# Altium PCB pcb.pcbdoc
Units mm, origin at the board's own origin, x right, y up, seen from the top; angles counter-clockwise.
Board outline 67.62 x 50.17 mm, 2 copper layers (Top Layer, Bottom Layer); 41 components, 42 nets, 145 pads, 50 vias.
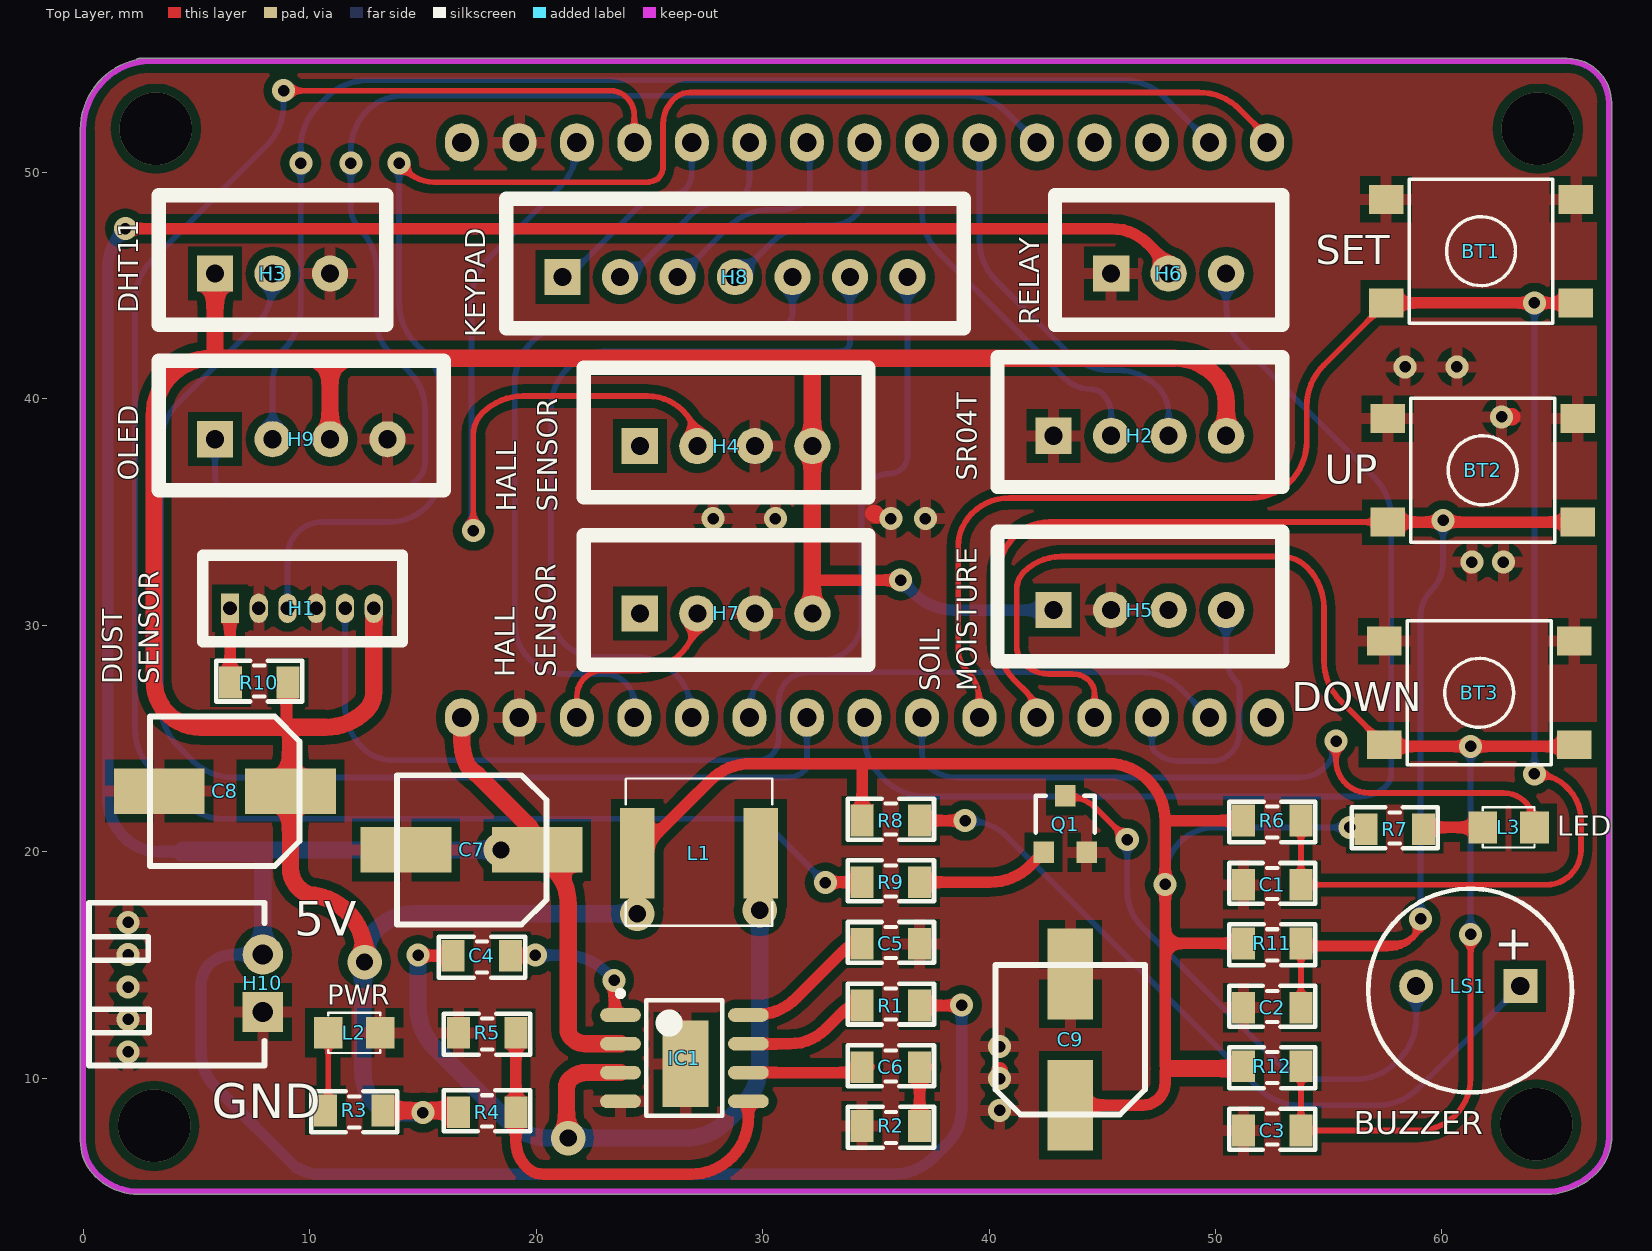
[diagram p0: Top Layer view]
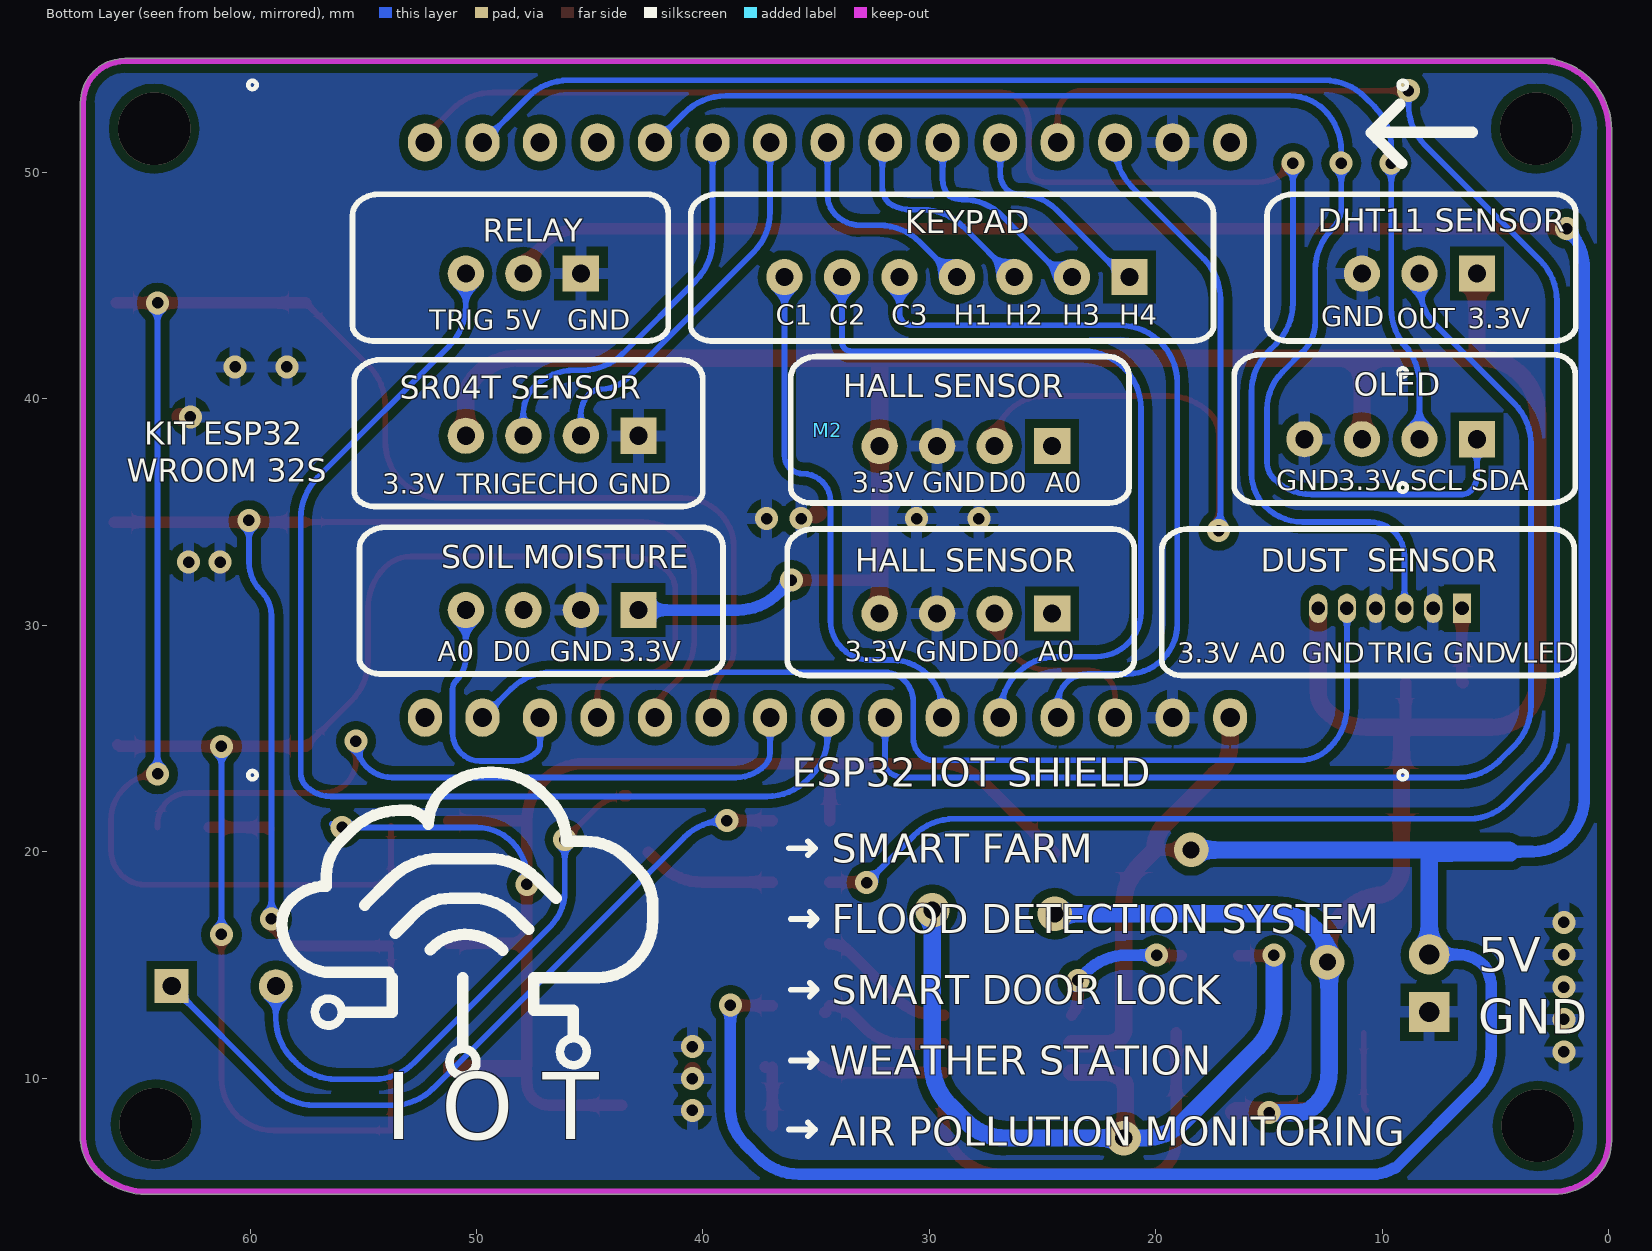
[diagram p1: Bottom Layer view, seen from below]
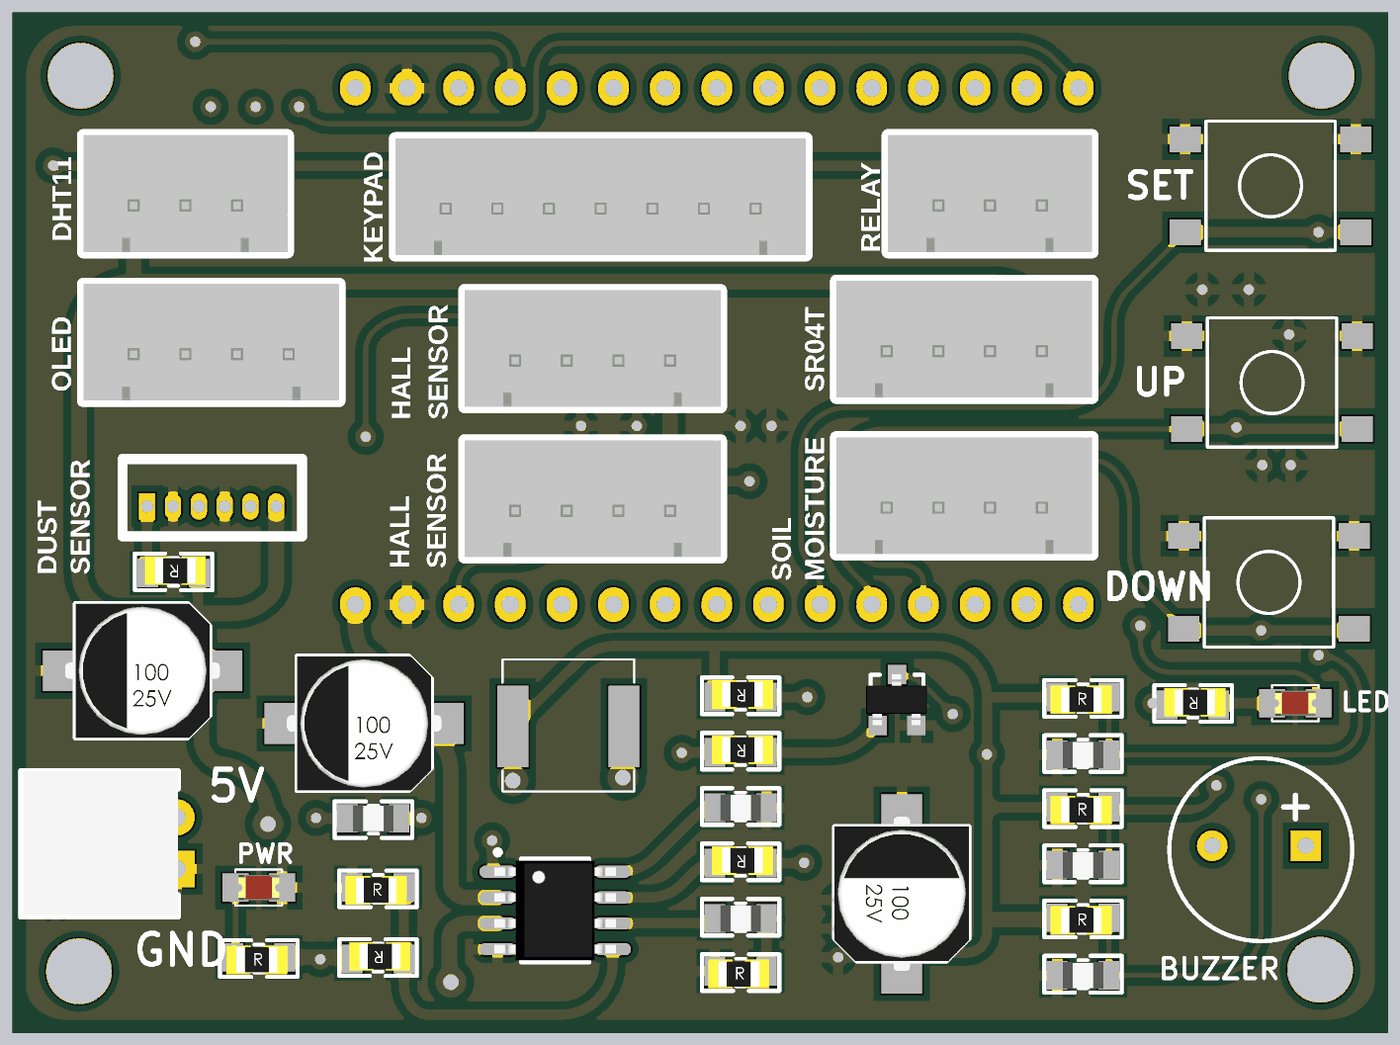
[diagram p2: 3D render of the assembled board from above, using the file's embedded part models]

## Layer stack, top to bottom
Top Solder: solder mask 0.0102, Solder Resist, Dk 3.5
Top Layer: signal copper 0.0356
Dielectric 1: dielectric 0.32, FR-4, Dk 4.8
Bottom Layer: signal copper 0.0356
Bottom Solder: solder mask 0.0102, Solder Resist, Dk 3.5

## Board outline
0.52,5.672 cw(c2.081,7.234) -0.127,7.234 -0.127,51.888 cw(c3.066,51.888) 0.808,54.146 cw(c0.898,54.056) 0.808,54.147 0.808,54.146 0.824,54.163 ccw(c0.914,54.073) 0.824,54.162 0.824,54.163 cw(c2.938,52.049) 2.341,54.978 cw(c2.449,54.911) 2.449,55.038 65.54,55.038 cw(c65.54,53.09) 66.917,54.468 cw(c65.54,53.09) 67.488,53.09 67.488,7.234 cw(c67.361,7.234) 67.479,7.187 cw(c65.279,7.386) 66.841,5.824 cw(c66.751,5.914) 66.841,5.824 66.825,5.808 ccw(c66.735,5.898) 66.825,5.808 cw(c64.567,8.066) 64.567,4.873 2.449,4.873 cw(c2.449,7.602)

## Design rules (kind name [scope] priority, off if disabled: settings)
Clearance [All] p1: gap=0.381 ignorepadtopadclearanceinfootprint=FALSE
PolygonConnect [All] p1: connectstyle=Relief reliefconductorwidth=0.508 reliefentries=4 polygonreliefangle="90 Angle" airgapwidth=0.381
RoutingVias [All] p1: holewidth=0.508 width=1.016 viastyle="Through Hole" minholewidth=0.508 minwidth=1.016 maxholewidth=0.508 maxwidth=1.016
SolderMaskExpansion [All] p1: expansion=0.102 istentingtop=FALSE
Width [All] p1: maxlimit=0.762 minlimit=0.254 preferedwidth=0.508
30 further rules are at their usual default settings.

## Classes and differential pairs
component class BLOCKDIAGRAM: *

## Components (designator, comment, footprint, x,y, rotation, side; value= is the part's Value field where it differs from the comment)
BT1 "Nut Nhan 4 Chan SMD 6x6" "Nut Nhan 4 Chan SMD 6x6" 61.722,46.529 r180 top
BT2 "Nut Nhan 4 Chan SMD 6x6" "Nut Nhan 4 Chan SMD 6x6" 61.798,36.852 r180 top
BT3 "Nut Nhan 4 Chan SMD 6x6" "Nut Nhan 4 Chan SMD 6x6" 61.646,27.022 r180 top
C1 "104" "tu 0805" 52.502,18.67 r180 top
C2 "104" "tu 0805" 52.502,13.245 r180 top
C3 "104" "tu 0805" 52.502,7.819 r180 top
C4 "103" "Tu 0805" 17.602,15.287 r0 top
C5 "104" "Tu 0805" 35.662,16.064 r180 top
C6 "4.7nf" "Tu 0805" 35.662,10.618 r180 top
C7 "100uF" "tu nhom 6.3 (d)" 17.149,20.088 r180 top
C8 "100uF" "tu nhom 6.3 (d)" 6.248,22.678 r180 top locked
C9 "100uF" "tu nhom 6.3 (d)" 43.586,11.706 r90 top
H1 "Header 6P 2.54" "Header 6P 1.27" 6.477,30.756 r0 top
H2 "Header 4P 2.54" XH2.54M-4 42.85,38.376 r0 top
H3 "Header 3P 2.54" XH2.54M-3 5.817,45.538 r0 top
H4 "Header 4P 2.54" XH2.54M-4 24.575,37.918 r0 top
H5 "Header 4P 2.54" XH2.54M-4 42.85,30.679 r0 top
H6 "Header 3P 2.54" XH2.54M-3 45.39,45.538 r0 top
H7 "Header 4P 2.54" XH2.54M-4 24.575,30.527 r0 top
H8 "Header 7P 2.54" XH2.54M-7 21.158,45.386 r0 top
H9 "Header 4P 2.54" XH2.54M-4 5.817,38.223 r0 top
H10 "Header 2P 2.54" "Header 2P DC 2.54" 6.731,12.925 r180 top
IC1 "MP2307 BUCK 3A" "SOP8 2" 23.744,8.989 r0 top
L1 "47uH SMD" "Cuon Cam 6.5x6.5 SMD" 30.683,23.491 r180 top
L2 "LED 0805" LED-0805-Red 10.82,12.01 r0 top
L3 "LED 0805" LED-0805-Red 61.798,21.078 r0 top
LS1 "Coi Chip Speaker" "COI CHIP 9MM" 66.759,14.068 r180 top
M2 "Module ESP32 WROOM" "Module esp32 wroom" 52.273,25.93 r180 bottom locked
Q1 "HF" SOT23 43.358,21.231 r0 top value=C9014
R1 "100K" "Tro SMD 0805" 35.662,13.214 r180 top
R2 "8.2k" "Tro SMD 0805" 35.662,7.896 r0 top
R3 "1k" "Tro SMD 0805" 11.963,8.581 r0 top
R4 "12k" "Tro SMD 0805" 17.831,8.505 r180 top
R5 "4.7k" "Tro SMD 0805" 17.831,12.01 r0 top
R6 "100R" "tro smd 0805" 52.502,21.383 r0 top
R7 "1k" "Tro SMD 0805" 57.912,21.002 r180 top
R8 "100R" "tro smd 0805" 35.662,21.383 r180 top
R9 "1k" "tro smd 0805" 35.662,18.66 r180 top
R10 "100R" "tro smd 0805" 7.772,27.479 r180 top
R11 "100R" "tro smd 0805" 52.502,15.958 r0 top
R12 "100R" "tro smd 0805" 52.502,10.532 r0 top

## Footprints (in the part's own frame and the unit in brackets; to place one, negate y for a bottom-side part, rotate by r counter-clockwise, add the part's x,y. Pads: shape width x height; smd on the part's side, far side on the other; paste and mask are expansions set on the pad)
"COI CHIP 9MM" [mm]
  rect 1.5x1.5 hole 0.8: 1(3.3,0)
  round 1.5 hole 0.8: 2(7.9,0)
  silkscreen extent 1.02,-4.31 10.02,4.69
"Cuon Cam 6.5x6.5 SMD" [mil]
  rect 60x157.48 smd: 1(30,140) 2(245,140)
  silkscreen extent 10,10 265,266
"Header 2P DC 2.54" [mil]
  rect 70x70 hole 35 unplated: 1(-47,0)
  round 70 hole 35 unplated: 2(-47,-100)
  silkscreen extent -50,-190 255,93, body extent -50,-190 250,90, height 237
"Header 6P 1.27" [mm]
  rect 0.8x1.3 hole 0.6: 1(0,0)
  oval 0.8x1.3 hole 0.6: 2(1.27,0) 3(2.54,0) 4(3.81,0) 5(5.08,0) 6(6.35,0)
  silkscreen extent -1.21,-1.47 7.62,2.34
LED-0805-Red [mil]
  rect 50x55 smd: 1(0,0) 2(90,0)
  silkscreen extent 0,-35 90,35, body extent 5,-25 85,25, height 43
"Module esp32 wroom" [mm]
  oval 1.5x1.7 hole 0.85: 1(0,0) 2(2.54,0) 3(5.08,0) 4(7.62,0) 5(10.16,0) 6(12.7,0) 7(15.24,0) 8(17.78,0) 9(20.32,0) 10(22.86,0) 11(25.4,0) 12(27.94,0) 13(30.48,0) 14(33.02,0) 15(35.56,0) 16(35.56,25.4) 17(33.02,25.4) 18(30.48,25.4) 19(27.94,25.4) 20(25.4,25.4) 21(22.86,25.4) 22(20.32,25.4) 23(17.78,25.4) 24(15.24,25.4) 25(12.7,25.4) 26(10.16,25.4) 27(7.62,25.4) 28(5.08,25.4) 29(2.54,25.4) 30(0,25.4)
  silkscreen extent -7.8,-2.72 43.36,28.12
"Nut Nhan 4 Chan SMD 6x6" [mil] "SW SMD button 4pin, 250 x250 mil"
  rect 60x50 smd: 1(-165,90) 2(165,-90) 3(165,90) 4(-165,-90)
  silkscreen extent -125,-125 125,125, body extent -180,-125 180,125, height 130
"SOP8 2" [mm]
  rect 2.032x3.81 smd: 0(2.85,1.65)
  oval 1.8x0.6 smd: 1(-0.025,3.805) 2(-0.025,2.535) 3(-0.025,1.265) 4(-0.025,-0.005) 5(5.625,-0.005) 6(5.625,1.265) 7(5.625,2.535) 8(5.625,3.805)
  silkscreen extent -0.15,-0.65 4.47,4.88, body extent -0.19,-0.55 5.8,4.35, height 1.6
SOT23 [mm] "SOT23"
  rect 0.9x0.95 smd: 1(-0.95,-1.25) 2(0,1.25)
  rect 0.9x0.95 smd mask+0: 3(0.95,-1.25)
  silkscreen extent -1.3,-0.38 1.3,1.25, body extent -1.52,-1.23 1.48,1.27, height 1.06
"Tro SMD 0805" [mm]
  rect 1.016x1.4 smd: 1(-1.27,0) 2(1.27,0)
  silkscreen extent -1.91,-0.97 1.91,0.84, body extent -1.59,-0.83 1.41,0.57, height 0.53
"tro smd 0805" [mm]
  rect 1.016x1.4 smd: 1(-1.27,0) 2(1.27,0)
  silkscreen extent -1.91,-0.97 1.91,0.84, body extent -1.59,-0.83 1.41,0.57, height 0.53
"tu 0805" [mil] "Compoment SMD 80x50mil"
  rect 40x55.12 smd: 1(-50,5) 2(50,5)
  silkscreen extent -75,-33 75,38, body extent -39,-21 39,31, height 29
"Tu 0805" [mil] "Compoment SMD 80x50mil"
  rect 40x55.12 smd: 1(-50,5) 2(50,5)
  silkscreen extent -75,-33 75,38, body extent -39,-21 39,31, height 29
"tu nhom 6.3 (d)" [mm]
  rect 4x2 smd: 1(-2.9,0) 2(2.9,0)
  silkscreen extent -3.3,-3.3 3.3,3.3, body extent -3.8,-3.3 3.8,3.3, height 8
XH2.54M-3 [mm]
  rect 1.6x1.6 hole 0.8: 1(0,0)
  round 1.6 hole 0.8: 2(2.54,0) 3(5.08,0)
  silkscreen extent -2.48,-2.26 7.56,3.46, body extent -2.48,-2.26 7.56,3.48, height 6.91
XH2.54M-4 [mm]
  rect 1.6x1.6 hole 0.8: 1(0,0)
  round 1.6 hole 0.8: 2(2.54,0) 3(5.08,0) 4(7.62,0)
  silkscreen extent -2.48,-2.26 10.1,3.46, body extent -2.48,-2.26 10.1,3.48, height 6.91
XH2.54M-7 [mm]
  rect 1.6x1.6 hole 0.8: 1(0,0)
  round 1.6 hole 0.8: 2(2.54,0) 3(5.08,0) 4(7.62,0) 5(10.16,0) 6(12.7,0) 7(15.24,0)
  silkscreen extent -2.48,-2.26 17.72,3.46, body extent -2.48,-2.26 17.72,3.48, height 6.91

## Part data
BT1 BT2 BT3: "Nut Nhan 4 Chan 6.2x6.2x3.5", Ma_Hang=MH002424, Ten="Nút Nhấn 4 Chân 6.2x6.2x3.1MM SMD"
C1 C2 C3: library part "Tu 0805 104 50V 10%", "Dán", Chung_Loai=Dán, Don_Vi=Con, Ma_Hang=MH004551, So_Chan=2, Ten_Linh_Kien="Tụ 0805 104-100nF 10% 50V"
C4: library part "Tu 0603 103 50V 10%", "Dán", Chung_Loai=Dán, Don_Vi=Con, Ma_Hang=MH004567, So_Chan=2, Ten_Linh_Kien="Tụ 0603 103-10nF 10% 50V"
C5 C6: library part "Tu 0603 104 50V 10%", "Dán", Chung_Loai=Dán, Don_Vi=Con, Ma_Hang=MH004568, So_Chan=2, Ten_Linh_Kien="Tụ 0603 104-100nF 10% 50V"
C7 C8 C9: library part "Tu Nhom 100uF 16V", "Dán", Chung_Loai=Dán, Don_Vi=Con, Ma_Hang=MH002219, So_Chan=2, Ten_Linh_Kien="Tụ Nhôm 100uF 16V 6.3x5.4MM"
H1: library part "Header 6P 2.54 Duc Thang", "Cắm", Chung_Loai=Cắm, Don_Vi=Con, Ma_Hang=MH001972, Ten_Linh_Kien="Header 6P XH2.54-6P Đực Thẳng"
H2 H4 H5 H7 H9: library part "Header 4P 2.54 Duc Thang", "Cắm", Chung_Loai=Cắm, Don_Vi=Con, Ma_Hang=MH001285, Ten_Linh_Kien="Header 4P XH2.54-4P Đực Thẳng"
H3 H6: library part "Header 3P 2.54 Duc Thang", "Cắm", Chung_Loai=Cắm, Don_Vi=Con, Ma_Hang=MH001292, Ten_Linh_Kien="Header 3P XH2.54-3P Đực Thẳng"
H8: library part "Header 7P 2.54 Duc Thang", "Cắm", Chung_Loai=Cắm, Don_Vi=Con, Ma_Hang=MH003369, Ten_Linh_Kien="Header 7P XH2.54-7P Đực Thẳng"
H10: library part "Header 2P 2.54 Duc Cong", "Cắm", Chung_Loai=Cắm, Don_Vi=Con, Ma_Hang=MH002852, Ten_Linh_Kien="Header 2P XH2.54-2P Đực Cong"
L1: library part "CUON CAM 47uH SMD", "Dán", Chung_Loai=Dán, Don_Vi=Con, Ma_Hang=MH004211, Ten_Linh_Kien="Cuộn Cảm 47uH 7x7x4MM CD74R"
L2 L3: library part "LED 0805 Do", "Dán", Chung_Loai=Dán, Don_Vi=Con, Ma_Hang=MH000897, Ten_Linh_Kien="LED 0805 Màu Đỏ (Red)"
LS1: "Còi chip"
Q1: library part "C1815 HF SMD", "NPN transistor"
R1 R2 R3 R4 R5 R7: library part "Tro 0603 5% 10k", "Dán", Chung_Loai=Dán, Don_Vi=Con, Ma_Hang=MH006316, So_Chan=2, Ten_Linh_Kien="Trở 0603 5% 10k"
R6 R8 R9 R10 R11 R12: library part "Tro 0805 5% 1k", "Dán", Chung_Loai=Dán, Don_Vi=Con, Ma_Hang=MH005234, So_Chan=2, Ten_Linh_Kien="Trở 0805 5% 1k"

## Via types
v1: diameter 1.016, hole 0.508, Top Layer to Bottom Layer, tented both sides, 41 vias
v2: diameter 1.524, hole 0.762, Top Layer to Bottom Layer, tented both sides, 5 vias
v3: diameter 3.2, hole 3.2, Top Layer to Bottom Layer, 4 vias

## Nets (pads, with @x,y where several pads share a name; then routed paths per layer and width w, separated by ;. In a path a pad name is that pad's centre, name@x,y a point inside that pad or via, vN(x,y) a via of type N, cw(c..) or ccw(c..) an arc to the next point about the centre after c; other vN are vias at no path point)
3.3V: C8.1 C9.1 H1.6 H2.4 H3.1 H4.4 H5.1 H7.4 H9.3 L1.2 R3.2 R4.2 R6.1 R7.2 R8.2 R10.1 R11.1 R12.1 | length 216.5
  Top Layer w0.508: 8.966,25.498 R10.1@8.966,27.479 ; L1.2 27.069,22.544 cw(c28.865,20.748) 27.197,22.663 27.687,23.154 cw(c29.483,21.358) 29.483,23.898 34.442,23.898 ; 32.195,32.051 ccw(c32.325,32.181) 32.325,31.997 v1(36.096,31.997) ; R8.2 34.392,23.775 cw(c34.565,23.775) 34.442,23.898 ; C9.1 44.348,8.806 44.348,8.81 46.787,8.81 ccw(c46.787,9.801) 47.777,9.801 47.777,10.304 R12.1@51.232,10.304 ; 47.854,21.383 R6.1 ; R12.1 51.232,10.563 47.777,10.563 47.777,15.958 ; R11.1 47.777,15.958 ; 34.442,23.898 45.237,23.898 cw(c45.237,21.358) 47.777,21.358 v1(47.777,18.564) 47.777,15.958
  Top Layer w0.762: H3.1 5.817,42.173 cw(c5.296,42.173) 5.664,41.805 ; H9.3 10.897,41.805 ; v2(12.421,15.135) 12.421,15.53 ccw(c9.881,15.53) 11.677,17.326 11.641,17.362 ccw(c9.844,15.566) 10.368,18.052 ccw(c9.844,15.566) 10.03,18.1 cw(c10.368,19.271) 9.148,19.271 C8.1 9.148,25.058 ccw(c8.526,25.058) 8.966,25.498 ; H1.6 12.827,27.057 cw(c11.7,27.057) 12.497,26.26 12.479,26.242 cw(c10.683,28.038) 10.683,25.498 8.966,25.498 ; R3.2 16.377,8.581 cw(c16.377,8.321) R4.2 ; H7.4 32.194,32.051 H4.4 32.194,41.713 ccw(c32.064,41.713) 32.156,41.805 ; H2.4 50.47,39.852 ccw(c48.76,39.852) 49.969,41.061 ccw(c48.173,39.265) 48.173,41.805 32.156,41.805 ; 5.664,41.805 ccw(c5.664,39.265) 3.124,39.265 3.124,27.555 ccw(c5.182,27.555) 5.182,25.498 8.966,25.498 ; 5.664,41.805 10.897,41.805 ; 10.897,41.805 32.156,41.805
  Bottom Layer w0.254: v1(47.777,18.564) 47.777,18.868 cw(c49.987,18.868) 49.987,21.078 v1(55.931,21.078) 56.236,21.078 v1@56.388,21.231
  Bottom Layer w0.508: v1@36.043,32.127 ccw(c36.227,32.127) v1(36.096,31.997) 36.67,31.423 ccw(c38.466,33.219) 38.466,30.679 H5.1
  Bottom Layer w0.762: v1(14.989,8.483) 13.744,8.483 cw(c13.744,9.6) 12.954,8.81 cw(c14.426,10.282) 12.344,10.282 12.344,15.111 cw(c14.426,15.111) 12.954,16.582 cw(c14.61,14.927) 14.61,17.268 v2(24.46,17.268)
5V: C7.1 H6.2 H10.2 IC1.2 M2.15 R1.1 | length 173.1
  Top Layer w0.508: v1@1.949,47.614 v1(1.854,47.52) 45.415,47.52 cw(c45.415,45.277) 47.001,46.863 H6.2@47.93,45.934 ; v2(18.44,20.088) C7.1 ; R1.1 38.673,13.214 ccw(c38.673,13.266) 38.71,13.23 v1(38.786,13.23)
  Top Layer w0.762: M2.15 16.713,24.924 ccw(c19.253,24.924) 16.986,23.78 17.114,23.651 ccw(c18.91,25.447) 17.452,23.367 19.567,21.253 cw(c18.402,20.088) C7.1 20.668,19.469 cw(c18.872,17.673) 21.412,17.673 21.412,12.15 ccw(c21.933,12.15) 21.565,11.782 ccw(c22.187,12.405) 22.187,11.524 IC1.2
  Bottom Layer w0.508: v1(1.854,47.52) ccw(c1.854,47.458) 1.811,47.502 ccw(c3.607,45.705) 1.067,45.705 1.067,22.435 ccw(c3.607,22.435) 1.811,20.639 ccw(c3.326,22.154) 3.326,20.011 4.299,20.011 ; 4.299,19.827 7.925,19.827 ; 5.182,11.02 5.182,13.983 cw(c6.886,13.983) 5.508,14.987 cw(c6.662,13.833) 6.662,15.465 H10.2 ; 5.199,11.165 ccw(c7.41,11.165) 5.847,9.602 9.37,6.078 ccw(c9.503,6.211) 9.503,6.023 ccw(c10.447,7.599) 10.447,5.762 35.752,5.762 ccw(c35.752,8.302) 37.549,6.506 38.176,7.134 ccw(c36.704,8.605) 38.786,8.605 v1(38.786,13.23)
  Bottom Layer w0.762: H10.2 7.925,19.827 ccw(c7.665,19.827) 7.849,20.011 4.299,20.011 cw(c4.483,19.827) 4.483,20.088 v2(18.44,20.088)
BUTTON1: BT3.1 BT3.3 C3.1 M2.4 R12.2 | length 65.7
  Top Layer w0.254: M2.4 44.653,27.003 ccw(c43.873,27.003) 44.425,27.555 ccw(c43.689,26.819) 43.689,27.86 42.633,27.86 cw(c42.633,29.421) 41.529,28.317 cw(c42.265,29.053) 41.224,29.053 41.224,31.62 cw(c42.265,31.62) 41.529,32.356 cw(c43.185,30.7) 43.185,33.042 52.896,33.042 cw(c52.896,31.419) 54.044,32.566 cw(c52.248,30.77) 54.788,30.77 54.788,28.455 ccw(c57.328,28.455) 55.532,26.659 BT3.3 ; R12.2@53.772,10.304 C3.1 58.953,7.692 ccw(c58.953,10.004) 61.265,10.004 v1(61.265,16.354) ; v1@61.036,16.354 cw(c61.036,16.278) v1@61.112,16.278
  Top Layer w0.508: BT3.3 57.531,24.66 v1(61.265,24.66) 65.761,24.66 BT3.1
  Bottom Layer w0.254: v1(61.265,16.354) v1(61.265,24.66) v1@61.265,24.888
BUTTON2: BT2.1 BT2.3 C2.1 M2.5 R11.2 | length 66.4
  Top Layer w0.254: M2.5 42.113,25.995 ccw(c39.573,25.995) 42.113,26.01 ccw(c40.712,26.01) 41.703,27 41.13,27.573 cw(c42.926,29.369) 40.386,29.369 40.386,32.142 cw(c42.926,32.142) 41.13,33.938 cw(c42.645,32.423) 42.645,34.566 BT2.3 ; C2.1 53.772,15.729 57.592,15.729 ccw(c57.592,17.268) v1@59.131,17.268 ; R11.2 57.973,15.958 ccw(c57.973,17.04) v1(59.055,17.04)
  Top Layer w0.508: BT2.3 BT2.1
  Bottom Layer w0.254: v1(59.055,17.04) 59.055,30.414 cw(c60.616,30.414) 59.512,31.518 ccw(c58.224,32.805) 60.046,32.805 v1(60.046,34.642)
BUTTON3: BT1.1 BT1.3 C1.1 M2.6 R6.2 | length 82.9
  Top Layer w0.254: M2.6 39.573,26.663 ccw(c37.665,26.663) 39.014,28.012 cw(c39.934,28.932) 38.633,28.932 38.633,33.475 cw(c40.715,33.475) 39.243,34.947 cw(c40.899,33.291) 40.899,35.632 51.583,35.632 ccw(c51.583,38.035) 53.282,36.336 ccw(c51.486,38.132) 54.026,38.132 54.026,39.686 cw(c56.566,39.686) 54.77,41.482 BT1.3 ; R6.2@53.772,21.154 C1.1 64.597,18.543 ccw(c64.597,20.088) 66.142,20.088 66.142,21.383 ccw(c64.084,21.383) v1(64.084,23.44)
  Top Layer w0.508: BT1.3 v1(64.084,44.243) BT1.1
  Bottom Layer w0.254: v1(64.084,23.44) v1(64.084,44.243)
COI: M2.19 R9.2 | length 83.2
  Top Layer w0.254: v1(8.839,53.616) 23.267,53.616 cw(c23.267,52.575) 24.003,53.311 cw(c23.206,52.514) 24.333,52.514 M2.19
  Top Layer w0.508: v1(32.766,18.64) cw(c32.815,18.591) 32.815,18.66 R9.2
  Bottom Layer w0.254: v1(8.839,53.616) 8.839,52.991 cw(c6.299,52.991) 8.095,51.195 3.03,46.13 ccw(c4.826,44.334) 2.286,44.334 2.286,25.407 ccw(c4.826,25.407) 3.03,23.611 4.492,22.149 ccw(c6.158,23.815) 6.158,21.459 28.894,21.459 cw(c28.894,18.919) 30.691,20.715 v1(32.766,18.64)
DAD_A0: H5.4 M2.3 | length 11.7
  Bottom Layer w0.254: M2.3 47.193,24.738 ccw(c47.627,24.738) 47.32,24.431 ccw(c48.333,25.444) 48.333,24.011 49.844,24.011 ccw(c49.844,25.184) 50.673,24.355 ccw(c49.753,25.275) 51.054,25.275 51.054,27.187 ccw(c50.534,27.187) 50.902,27.555 cw(c51.944,28.598) 50.47,28.598 H5.4
DAD_D0: H5.3
DHT11_OUT: H3.2 M2.9 | length 53.5
  Bottom Layer w0.254: H3.2 8.357,45.041 cw(c5.817,45.041) 7.613,43.245 4.173,39.805 ccw(c5.969,38.009) 3.429,38.009 3.429,26.474 ccw(c5.969,26.474) 4.173,24.678 4.819,24.032 ccw(c6.615,25.828) 6.615,23.288 31.116,23.288 ccw(c31.116,24.329) 31.852,23.593 ccw(c31.606,23.838) 31.953,23.838 M2.9
DUST_ANALOG: H1.5 M2.2 | length 47.6
  Bottom Layer w0.254: H1.5 11.557,26.423 ccw(c14.097,26.423) 12.301,24.627 12.344,24.583 ccw(c13.632,25.871) 13.632,24.05 29.852,24.05 ccw(c29.852,24.83) 30.404,24.279 ccw(c29.668,25.014) 30.709,25.014 30.709,26.635 cw(c32.009,26.635) 31.09,27.555 cw(c32.009,26.635) 32.009,27.936 46.674,27.936 cw(c46.674,25.396) 48.471,27.192 M2.2
DUST_LED_TRIG: H1.3 M2.30 | length 67.7
  Top Layer w0.254: v1(13.945,50.415) 14.298,50.062 ccw(c15.469,51.233) 15.469,49.577 24.851,49.577 ccw(c24.851,50.579) 25.377,49.726 ccw(c24.83,50.273) 25.603,50.273 25.603,52.131 cw(c27.164,52.131) 26.06,53.235 cw(c26.796,52.499) 26.796,53.539 49.265,53.539 cw(c49.265,50.999) 50.664,53.12 cw(c49.265,50.999) 51.061,52.795 M2.30@52.233,51.623
  Bottom Layer w0.254: H1.3 9.017,33.066 cw(c10.491,33.066) 9.449,34.108 cw(c10.553,33.005) 10.553,34.566 13.508,34.566 ccw(c13.508,36.907) 15.164,35.251 ccw(c13.692,36.723) 15.773,36.723 15.773,40.295 ccw(c13.233,40.295) 15.029,42.091 14.689,42.432 cw(c16.485,44.228) 13.945,44.228 v1(13.945,50.415)
GND: BT1.2 BT1.4 BT2.2 BT2.4 BT3.2 BT3.4 C1.2 C2.2 C3.2 C5.1 C7.2 C8.2 C9.2 H1.2 H1.4 H2.1 H3.3 H4.3 H5.2 H6.1 H7.3 H9.4 H10.1 IC1.4 L2.2 M2.14 M2.17 Q1.3 R2.1 R5.1 | length 1.4
  Top Layer w0.762: 34.9,34.947 cw(c34.9,34.763) 35.03,34.893 ; v1(40.462,8.581) v1@40.538,8.581 ; v1@40.462,10.334 40.462,9.953 ccw(c40.538,9.953) v1@40.538,9.877 ; v1@61.265,32.661 cw(c61.449,32.661) v1(61.319,32.791) ; v1(62.636,39.214) v1@63.094,39.214
  Bottom Layer w0.762: v1@2.057,16.811 v1@2.057,16.887
  other v1: 40.462,9.991 1.981,11.172 40.462,11.401 1.981,12.601 1.981,14.03 1.981,15.458 1.981,16.887 62.713,32.791 27.813,34.718 30.556,34.718 35.662,34.718 37.186,34.718 58.369,41.424 60.655,41.424
HALL1_A0: H4.1
HALL1_D0: H4.2 M2.18 | length 35.1
  Top Layer w0.254: v1(17.221,34.185) 17.221,38.421 cw(c18.584,38.421) 17.62,39.384 cw(c19.416,37.588) 19.416,40.128 24.917,40.128 cw(c24.917,37.918) H4.2@27.127,37.918
  Bottom Layer w0.254: v1(17.221,34.185) cw(c17.405,34.369) 17.145,34.369 17.145,44.41 cw(c19.685,44.41) 17.889,46.206 21.049,49.366 ccw(c19.253,51.163) 21.793,51.163 M2.18
HALL2_A0: H7.1
HALL2_D0: H7.2 M2.13 | length 8.3
  Top Layer w0.254: M2.13 21.793,26.869 cw(c22.936,26.869) 22.936,28.012 24.6,28.012 ccw(c24.6,30.527) H7.2
KEYPAD_C1: H8.7 M2.10 | length 23.9
  Bottom Layer w0.254: M2.10 29.413,26.234 cw(c31.648,26.234) 31.648,28.47 32.614,28.47 ccw(c32.614,30.222) 34.366,30.222 34.366,35.48 cw(c35.585,35.48) 35.585,36.699 ccw(c35.585,37.512) 36.398,37.512 H8.7
KEYPAD_C2: H8.6 M2.11 | length 35.7
  Bottom Layer w0.254: M2.11 26.873,26.082 ccw(c24.333,26.082) 24.333,28.622 22.631,28.622 cw(c22.631,30.603) 20.65,30.603 20.65,39.569 cw(c23.19,39.569) 23.19,42.109 33.452,42.109 ccw(c33.452,42.516) 33.858,42.516 H8.6
KEYPAD_C3: H8.5 M2.12 | length 34.2
  Bottom Layer w0.254: M2.12 24.333,26.539 ccw(c23.012,26.539) 23.012,27.86 21.26,27.86 cw(c21.26,30.07) 19.05,30.07 19.05,40.712 cw(c21.59,40.712) 21.59,43.252 30.785,43.252 ccw(c30.785,43.786) 31.318,43.786 H8.5
KEYPAD_H1: H8.4 M2.23 | length 9.7
  Bottom Layer w0.254: H8.4@28.804,45.447 cw(c28.717,45.447) H8.4 ccw(c28.778,45.631) 28.952,45.458 30.422,46.928 cw(c32.218,45.132) 32.218,47.672 33.034,47.672 ccw(c33.034,49.233) 34.138,48.129 ccw(c33.279,48.988) 34.493,48.988 M2.23
KEYPAD_H2: H8.3 M2.22 | length 9.4
  Bottom Layer w0.254: H8.3@26.325,45.422 28.517,47.614 cw(c30.313,45.818) 30.313,48.358 30.792,48.358 ccw(c30.792,50.179) 31.783,48.651 ccw(c31.066,49.368) 32.08,49.368 32.08,51.023 ccw(c31.647,51.023) M2.22
KEYPAD_H3: H8.2 M2.21 | length 9.2
  Bottom Layer w0.254: H8.2 ccw(c23.698,46.306) 24.349,45.655 26.764,48.071 cw(c28.56,46.275) 28.56,48.815 ccw(c28.56,49.954) 29.113,48.958 ccw(c28.39,49.682) 29.413,49.682 M2.21
KEYPAD_H4: H8.1 M2.20 | length 9
  Bottom Layer w0.254: H8.1 ccw(c21.158,45.999) 21.592,45.566 24.369,48.343 cw(c26.06,46.652) 26.06,49.044 ccw(c26.06,49.779) 26.581,49.259 ccw(c25.875,49.965) 26.873,49.965 M2.20
LED: L3.2 M2.7 | length 32.6
  Top Layer w0.254: v1(55.321,24.888) 55.321,24.049 ccw(c56.768,24.049) 56.768,22.602 62.713,22.602 cw(c62.713,21.231) 63.633,22.248 cw(c62.713,21.231) 64.084,21.231 L3.2
  Bottom Layer w0.254: M2.7 37.033,24.373 ccw(c37.814,24.373) 37.262,23.821 ccw(c38.55,25.109) 38.55,23.288 53.721,23.288 ccw(c53.721,24.888) v1(55.321,24.888)
NetC4_1: C4.1 IC1.3 L1.1 | length 35.2
  Top Layer w0.508: v1(14.783,15.439) ccw(c14.844,15.501) 14.844,15.414 C4.1
  Top Layer w0.762: v2@21.336,7.362 21.336,9.585 cw(c21.856,9.585) 21.488,9.953 cw(c22.215,9.227) 22.215,10.254 IC1.3
  Bottom Layer w0.762: v1(14.783,15.439) 14.783,13.139 ccw(c17.323,13.139) 15.527,11.343 18.763,8.106 ccw(c20.559,9.902) 20.559,7.362 v2(21.412,7.362) 26.608,7.362 ccw(c26.608,9.902) 28.405,8.106 29.126,8.828 ccw(c27.33,10.624) 29.87,10.624 v2(29.87,17.421)
NetC4_2: C4.2 IC1.1 | length 6.8
  Top Layer w0.508: C4.2 19.751,15.414 ccw(c19.751,15.501) 19.812,15.439 v1(19.964,15.439) ; v1(23.438,14.328) 23.438,13.472 ccw(c24.397,13.472) IC1.1
  Bottom Layer w0.508: v1(19.964,15.439) 21.274,15.439 cw(c21.274,12.899) 23.071,14.695 v1(23.438,14.328) cw(c23.178,14.068) v1@23.546,14.068
NetC5_2: C5.2 IC1.8 | length 6.2
  Top Layer w0.508: IC1.8 29.678,12.794 ccw(c29.678,15.334) 31.474,13.538 33.507,15.571 ; 33.507,15.571 cw(c34.392,14.686) C5.2
NetC6_1: C6.1 R2.2 | length 2.6
  Top Layer w0.508: R2.2 C6.1 ; C6.1@37.236,10.491 C6.1@37.236,10.512
NetC6_2: C6.2 IC1.6 | length 5.4
  Top Layer w0.508: IC1.6 34.074,10.254 ccw(c34.074,11.135) C6.2@34.696,10.512
NetH1_1: H1.1 R10.2 | length 3.3
  Top Layer w0.508: R10.2@6.426,27.479 ccw(c6.426,27.53) 6.477,27.53 H1.1
NetIC1_5: IC1.5 R4.1 R5.2 | length 18.1
  Top Layer w0.508: R5.2 R4.1 19.101,7.232 ccw(c20.749,7.232) 19.583,6.067 ccw(c20.319,6.803) 20.319,5.762 26.837,5.762 ccw(c26.837,8.302) 28.633,6.506 28.651,6.524 ccw(c26.919,8.256) 29.369,8.256 IC1.5
NetIC1_7: IC1.7 R1.2 | length 5.6
  Top Layer w0.508: IC1.7 31.198,11.524 ccw(c31.198,13.767) 32.784,12.181 33.412,12.808 cw(c34.392,11.829) R1.2 ; R1.2@34.58,12.925 R1.2@34.62,12.925
NetL2_1: L2.1 R3.1 | length 3.5
  Top Layer w0.254: R3.1 ccw(c10.387,8.888) 10.82,8.888 L2.1
NetL3_1: L3.1 R7.1 | length 2.7
  Top Layer w0.508: R7.1 cw(c59.258,21.002) 59.258,21.078 L3.1
NetLS1_1: LS1.1 R8.1 | length 33.6
  Top Layer w0.508: R8.1 v1(38.938,21.383)
  Bottom Layer w0.254: v1(38.938,21.383) 39.029,21.383 cw(c39.029,18.843) 40.825,20.639 51.91,9.554 ccw(c53.706,11.35) 53.706,8.81 57.149,8.81 ccw(c57.149,11.35) 58.945,9.554 LS1.1
NetLS1_2: LS1.2 Q1.2 | length 25.4
  Top Layer w0.254: Q1.2 cw(c43.358,20.531) 44.736,21.91 v1(46.101,20.545)
  Top Layer w0.508: Q1.2 Q1.2@43.494,22.481
  Bottom Layer w0.254: v1(46.101,20.545) 46.101,18.26 ccw(c48.312,18.26) 46.748,16.698 ccw(c48.312,18.26) 46.749,16.697 52.748,10.697 ccw(c54.545,12.493) 54.545,9.953 56.174,9.953 ccw(c56.174,12.493) 57.97,10.697 58.115,10.842 ccw(c56.319,12.638) 58.859,12.638 LS1.2
NetQ1_1: Q1.1 R9.1 | length 5.9
  Top Layer w0.508: R9.1 40.035,18.66 ccw(c40.035,21.2) 41.831,19.404 Q1.1
OLED_SCL: H9.2 M2.29 | length 56.3
  Bottom Layer w0.254: H9.2 8.357,40.651 cw(c10.897,40.651) 9.101,42.447 ; 8.839,42.186 8.857,42.204 ccw(c7.061,44) 9.601,44 v1(9.601,50.415) 9.601,51.116 cw(c12.141,51.116) 10.345,52.912 10.762,53.329 cw(c12.558,51.533) 12.558,54.073 45.938,54.073 cw(c45.938,51.533) 47.734,53.329 M2.29
OLED_SDA: H9.1 M2.26 | length 59.3
  Bottom Layer w0.254: H9.1 5.817,36.612 ccw(c6.771,36.612) 6.096,35.937 ccw(c6.464,36.305) 6.464,35.785 13.127,35.785 ccw(c13.127,38.126) 14.783,36.471 ccw(c14.047,37.206) 15.088,37.206 15.088,39.539 ccw(c12.746,39.539) 14.402,41.195 13.493,42.104 cw(c14.794,43.405) 12.954,43.405 12.954,45.705 ccw(c10.414,45.705) 12.21,47.502 cw(c13.173,48.465) 11.811,48.465 v1(11.811,50.415) 11.811,50.963 cw(c14.351,50.963) 12.555,52.759 cw(c14.07,51.244) 14.07,53.387 39.004,53.387 cw(c39.004,50.847) 40.8,52.643 M2.26
RELAY_IN: H6.3 M2.8 | length 51
  Bottom Layer w0.254: M2.8 34.493,25.128 ccw(c37.033,25.128) 35.237,23.331 35.375,23.194 ccw(c37.171,24.99) 37.171,22.45 56.427,22.45 ccw(c56.427,24.011) 57.531,22.907 ccw(c56.979,23.459) 57.76,23.459 57.76,34.733 ccw(c55.22,34.733) 57.016,36.529 51.214,42.331 cw(c53.01,44.127) 50.47,44.127 H6.3
SFR04_ECHO: H2.2 M2.24 | length 16.7
  Bottom Layer w0.254: M2.24 37.033,48.267 ccw(c39.573,48.267) 37.777,46.471 43.33,40.918 ccw(c44.501,42.089) 44.501,40.433 cw(c44.501,39.697) 45.021,40.217 cw(c44.131,39.327) 45.39,39.327 H2.2
SFR04_TRIG: H2.3 M2.25 | length 17.4
  Bottom Layer w0.254: M2.25 39.573,47.022 ccw(c42.113,47.022) 40.317,45.226 43.528,42.015 ccw(c45.324,43.811) 45.324,41.271 45.658,41.271 cw(c45.658,38.731) 47.455,40.527 cw(c46.307,39.38) 47.93,39.38 H2.3
pads on no net: IC1.0 M2.1 M2.16 M2.27 M2.28
copper on no net:
  other v3: 3.124,7.896 64.16,7.972 3.2,51.939 64.237,51.939

## Polygon pours and split planes (outlines as drawn)
GND on Top Layer "Top Layer-No Net" (solid, pour order 0): 0.52,5.672 cw(c2.081,7.234) -0.127,7.234 -0.127,51.888 cw(c3.066,51.888) 0.808,54.146 0.824,54.163 ccw(c0.914,54.073) 0.824,54.162 0.824,54.163 cw(c2.938,52.049) 2.938,55.038 65.54,55.038 cw(c65.54,53.09) 66.917,54.468 cw(c65.54,53.09) 67.488,53.09 67.488,7.386 cw(c65.279,7.386) 66.841,5.824 cw(c66.751,5.914) 66.841,5.824 66.825,5.808 ccw(c66.735,5.898) 66.825,5.808 cw(c64.567,8.066) 64.567,4.873 2.449,4.873 cw(c2.449,7.602)
GND on Bottom Layer "Top Layer-No Net1" (solid, pour order 1): 0.52,5.672 cw(c2.081,7.234) -0.127,7.234 -0.127,51.888 cw(c3.066,51.888) 0.808,54.146 0.824,54.163 ccw(c0.914,54.073) 0.824,54.162 0.824,54.163 cw(c2.938,52.049) 2.938,55.038 65.54,55.038 cw(c65.54,53.09) 66.917,54.468 cw(c65.54,53.09) 67.488,53.09 67.488,7.386 cw(c65.279,7.386) 66.841,5.824 cw(c66.751,5.914) 66.841,5.824 66.825,5.808 ccw(c66.735,5.898) 66.825,5.808 cw(c64.567,8.066) 64.567,4.873 2.449,4.873 cw(c2.449,7.602)

## Keep-outs
Keep-Out Layer:
  lines w0.254: 2.449,54.911 3.556,54.911 14.478,54.911 63.805,54.911 ; 63.398,5 64.567,5 ccw(c64.567,8.066) 66.735,5.898 66.751,5.914 ccw(c65.279,7.386) 67.361,7.386 67.361,8.556 ; 63.398,54.911 64.567,54.911 ; 63.805,5 14.478,5 3.556,5 2.449,5 cw(c2.449,7.602) 0.61,5.762 cw(c2.081,7.234) 0,7.234 0,8.556 0,51.888 cw(c3.066,51.888) 0.898,54.056 0.914,54.073 cw(c2.938,52.049) 2.938,54.911 63.729,54.911 65.54,54.911 cw(c65.54,53.09) 66.827,54.378 cw(c65.54,53.09) 67.361,53.09 67.361,51.363 67.361,8.556 ; 67.361,7.234 67.361,8.556 ; 67.361,51.888 67.361,8.556

## Silkscreen, mask and mechanical layers (free items; w line width, h text height)
Top Overlay:
  text "SET" at 54.432,45.945 h1.27
  text "DHT11" at 2.743,43.786 h1.52 r90
  text "RELAY" at 42.52,43.252 h1.52 r90
  text "KEYPAD" at 18.059,42.719 h1.52 r90
  text "OLED" at 2.725,36.394 h1.52 r90
  text "SR04T" at 39.758,36.394 h1.52 r90
  text "UP" at 54.813,36.267 h1.27
  text "HALL" at 19.429,35.023 h1.52 r90
  text "SENSOR" at 21.241,35.023 h1.52 r90
  text "HALL" at 19.353,27.708 h1.52 r90
  text "SENSOR" at 21.165,27.708 h1.52 r90
  text "DUST" at 2.018,27.403 h1.52 r90
  text "SENSOR" at 3.639,27.403 h1.52 r90
  text "SOIL" at 38.137,27.098 h1.52 r90
  text "MOISTURE" at 39.758,27.098 h1.52 r90
  text "DOWN" at 53.365,26.209 h1.27
  text "LED" at 65.1,20.723 h0.89
  text "5V" at 9.322,16.303 h1.52
  text "PWR" at 10.77,13.255 h0.89
  text "GND" at 5.664,8.226 h1.52
  text "BUZZER" at 56.109,7.54 h1.02
Bottom Overlay:
  drawing of 242 lines, arcs and shapes, not listed
  text "DHT11 SENSOR" at 12.852,47.393 h1.02
  text "KEYPAD" at 31.064,47.311 h1.02
  text "RELAY" at 49.733,46.935 h1.02
  text "H4" at 21.615,43.278 h0.89
  text "H3" at 24.13,43.278 h0.89
  text "H2" at 26.645,43.278 h0.89
  text "H1" at 28.931,43.278 h0.89
  text "C3" at 31.674,43.278 h0.89
  text "C2" at 34.417,43.278 h0.89
  text "C1" at 36.779,43.278 h0.89
  text "GND" at 12.7,43.202 h0.89
  text "3.3V" at 6.223,43.125 h0.89
  text "OUT" at 9.347,43.125 h0.89
  text "GND" at 45.999,43.049 h0.89
  text "5V" at 48.743,43.049 h0.89
  text "TRIG" at 52.095,43.049 h0.89
  text "OLED" at 11.252,40.154 h1.02
  text "HALL SENSOR" at 33.807,40.077 h1.02
  text "SR04T SENSOR" at 53.391,40.001 h1.02
  text "KIT ESP32" at 64.678,37.989 h1.02
  text "WROOM 32S" at 65.449,36.344 h1.02
  text "SDA" at 6.071,35.963 h0.89
  text "SCL" at 8.763,35.963 h0.89
  text "3.3V" at 11.938,35.963 h0.89
  text "GND" at 14.681,35.963 h0.89
  text "A0" at 24.892,35.886 h0.89
  text "D0" at 27.407,35.886 h0.89
  text "GND" at 30.302,35.886 h0.89
  text "3.3V" at 33.426,35.886 h0.89
  text "GND" at 44.171,35.81 h0.89
  text "ECHO" at 48.057,35.81 h0.89
  text "TRIG" at 50.876,35.81 h0.89
  text "3.3V" at 54.153,35.81 h0.89
  text "SOIL MOISTURE" at 51.562,32.534 h1.02
  text "DUST  SENSOR" at 15.367,32.381 h1.02
  text "HALL SENSOR" at 33.274,32.381 h1.02
  text "A0" at 25.197,28.419 h0.89
  text "D0" at 27.711,28.419 h0.89
  text "GND" at 30.607,28.419 h0.89
  text "3.3V" at 33.731,28.419 h0.89
  text "3.3V" at 43.713,28.419 h0.89
  text "GND" at 46.761,28.419 h0.89
  text "D0" at 49.276,28.419 h0.89
  text "A0" at 51.714,28.419 h0.89
  text "VLED" at 4.648,28.346 h0.89
  text "GND" at 7.315,28.346 h0.89
  text "TRIG" at 10.592,28.346 h0.89
  text "GND" at 13.564,28.346 h0.89
  text "A0" at 15.85,28.346 h0.89
  text "3.3V" at 19.05,28.346 h0.89
  text "ESP32 IOT SHIELD" at 36.068,22.882 h1.27
  text "SMART FARM" at 34.315,19.529 h1.27
  text "FLOOD DETECTION SYSTEM" at 34.315,16.405 h1.27
  text "5V" at 5.766,14.703 h1.52
  text "SMART DOOR LOCK" at 34.315,13.28 h1.27
  text "GND" at 5.766,11.96 h1.52
  text "WEATHER STATION" at 34.392,10.156 h1.27
  text "AIR POLLUTION MONITORING" at 34.392,7.032 h1.27
  text "I O T" at 54.026,6.342 h5.08

## Text inside footprints (layer, text, board x,y; h text height)
LS1: Top Overlay "+" at 64.059,16.568 h1.52 r180